# Altium PCB G8160-03-Sensor-Board.PcbDoc
Units mm, origin at the board's own origin, x right, y up, seen from the top; angles counter-clockwise.
Board outline 40 x 12.7 mm, 2 copper layers (Top Layer, Bottom Layer), stack 1.595 mm thick; 15 components, 12 nets, 67 pads, 12 vias.
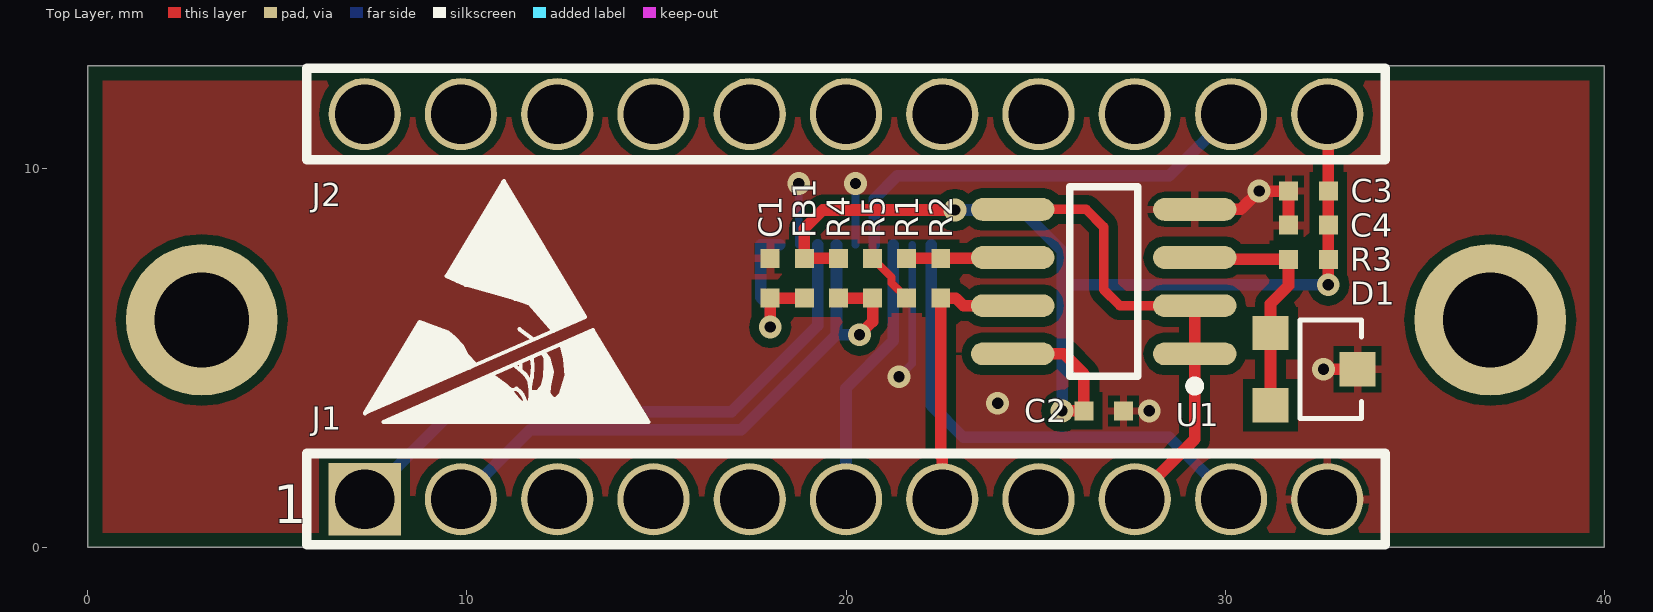
[diagram p0: Top Layer view]
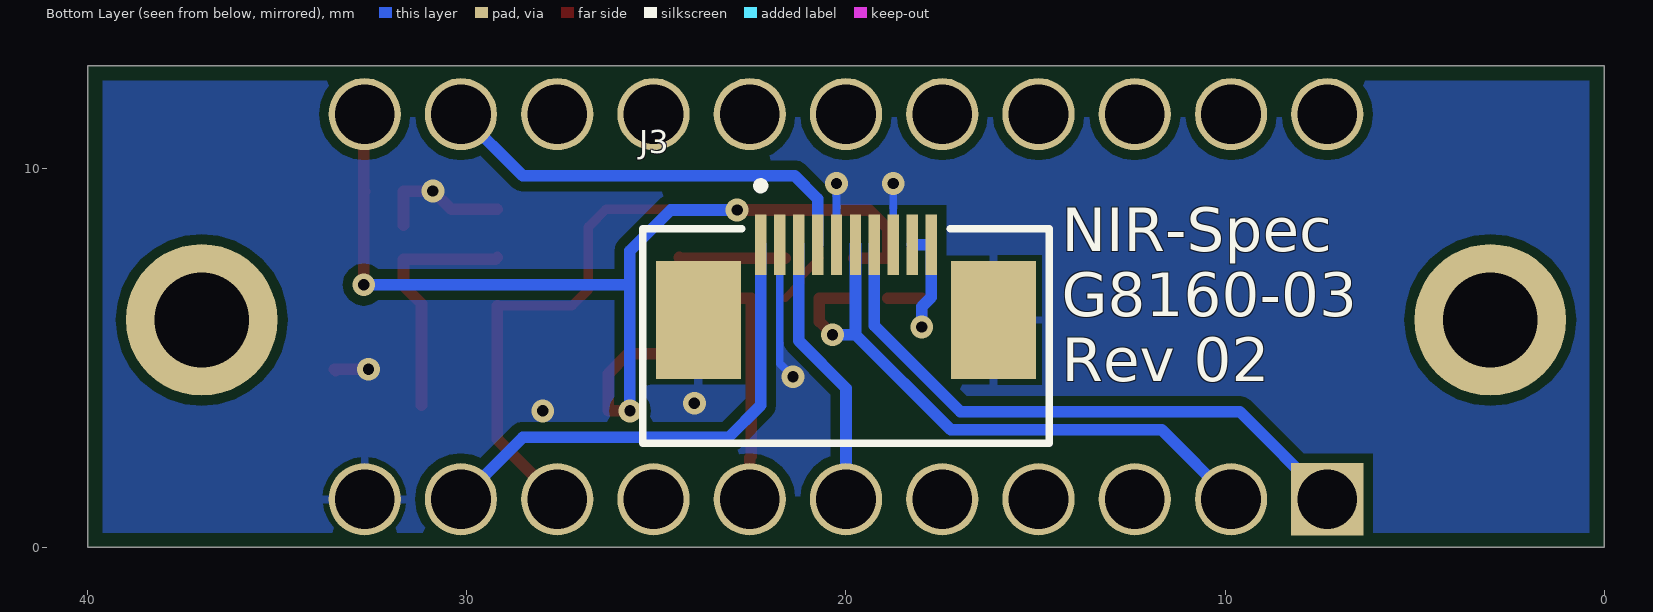
[diagram p1: Bottom Layer view, seen from below]
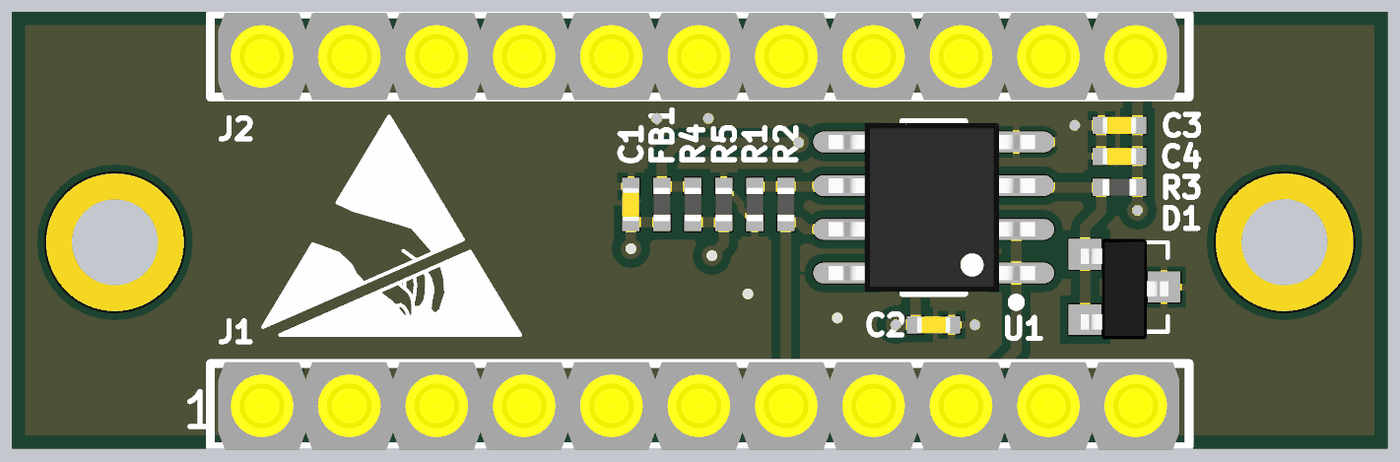
[diagram p2: 3D render of the assembled board from above, using the file's embedded part models]

## Layer stack, top to bottom
Top Solder: solder mask 0.0102, Solder Resist, Dk 3.5
Top Layer: signal copper 0.0356
Dielectric 1: core 1.524, FR-4, Dk 4.2
Bottom Layer: signal copper 0.0356
Solder Side: solder mask 0.0102, Solder Resist, Dk 3.5

## Board outline
0,0 40,0 40,12.7 0,12.7

## Design rules (kind name [scope] priority, off if disabled: settings)
BoardOutlineClearance [All] p1: gap=0.381 ignorepadtopadclearanceinfootprint=FALSE
Clearance "Clearance Polygons" [InPolygon] p1: gap=0.254 ignorepadtopadclearanceinfootprint=FALSE except(0: Arc-Hole Track-Hole SMDPad-Hole THPad-Hole Via-Hole Fill-Hole Poly-Hole Region-Hole Text-Hole)
Clearance [All] p2: gap=0.127 ignorepadtopadclearanceinfootprint=FALSE except(0: Arc-Hole Track-Hole SMDPad-Hole THPad-Hole Via-Hole Fill-Hole Poly-Hole Region-Hole Text-Hole)
ComponentClearance "HM-TRP & UFL" [InComponent('X1') vs InComponent('U1')] p1: gap=0 collisioncheckmode=3 verticalgap=0 showdistances=FALSE
ComponentClearance [All] p2: gap=0.025 collisioncheckmode=3 verticalgap=0.025 showdistances=FALSE
DiffPairsRouting [All] p1: maxlimit=10 minlimit=0.127 mostfreqgap=0.203 toplayer_minwidth=0.127 toplayer_maxwidth=0.381 toplayer_prefwidth=0.203 bottomlayer_minwidth=0.127 bottomlayer_maxwidth=0.381 bottomlayer_prefwidth=0.203 maxuncoupledlength=12.7
HoleSize [All] p1: absolutevalues=TRUE maxlimit=6.731 minlimit=0.254 maxpercent=80.000 minpercent=20.000
HoleToHoleClearance [All] p1: gap=0.254 allowstackedmicrovias=FALSE
MinimumAnnularRing [All] p1: minimumring=0.102
MinimumSolderMaskSliver [All] p1: minsoldermaskwidth=0
PlaneClearance [All] p1: clearance=0.254
PlaneConnect [All] p1: planeconnectstyle=Relief reliefexpansion=0.102 reliefentries=4 reliefconductorwidth=0.152 reliefairgap=0.152
PolygonConnect THERM_V_UNREG [All vs IsNamedPolygon('Top Layer-V_UNREG')] p1: connectstyle=Relief reliefconductorwidth=0.254 reliefentries=2 polygonreliefangle="90 Angle" airgapwidth=0.254
PolygonConnect THERM_VBAT_BOT_1 [All vs IsNamedPolygon('VBAT_BOT')] p2: thpad.connectstyle=Relief thpad.reliefconductorwidth=0.254 thpad.reliefentries=4 thpad.polygonreliefangle="90 Angle" thpad.airgapwidth=0.254 smdpad.connectstyle=Relief smdpad.reliefconductorwidth=0.762 smdpad.reliefentries=4 smdpad.polygonreliefangle="90 Angle" smdpad.airgapwidth=0.254 via.connectstyle=Relief via.reliefconductorwidth=0.254 via.reliefentries=4 via.polygonreliefangle="90 Angle" via.airgapwidth=0.254
PolygonConnect THERM_VBAT_BOT [All vs IsNamedPolygon('VBAT_BOT')] p3: thpad.connectstyle=Relief thpad.reliefconductorwidth=0.254 thpad.reliefentries=4 thpad.polygonreliefangle="90 Angle" thpad.airgapwidth=0.254 smdpad.connectstyle=Relief smdpad.reliefconductorwidth=0.762 smdpad.reliefentries=4 smdpad.polygonreliefangle="90 Angle" smdpad.airgapwidth=0.254 via.connectstyle=Relief via.reliefconductorwidth=0.254 via.reliefentries=4 via.polygonreliefangle="90 Angle" via.airgapwidth=0.254
PolygonConnect PolygonConnect_1 [All vs IsNamedPolygon('VBAT_TOP')] p4: thpad.connectstyle=Relief thpad.reliefconductorwidth=0.254 thpad.reliefentries=4 thpad.polygonreliefangle="90 Angle" thpad.airgapwidth=0.254 smdpad.connectstyle=Relief smdpad.reliefconductorwidth=0.762 smdpad.reliefentries=4 smdpad.polygonreliefangle="90 Angle" smdpad.airgapwidth=0.254 via.connectstyle=Relief via.reliefconductorwidth=0.254 via.reliefentries=4 via.polygonreliefangle="90 Angle" via.airgapwidth=0.254
PolygonConnect THERM_VBAT_TOP_1 [All vs IsNamedPolygon('VBAT_TOP')] p5: thpad.connectstyle=Relief thpad.reliefconductorwidth=0.254 thpad.reliefentries=4 thpad.polygonreliefangle="90 Angle" thpad.airgapwidth=0.254 smdpad.connectstyle=Relief smdpad.reliefconductorwidth=0.762 smdpad.reliefentries=4 smdpad.polygonreliefangle="90 Angle" smdpad.airgapwidth=0.254 via.connectstyle=Relief via.reliefconductorwidth=0.254 via.reliefentries=4 via.polygonreliefangle="90 Angle" via.airgapwidth=0.254
PolygonConnect THERM_VBAT_TOP [All vs IsNamedPolygon('VBAT_TOP')] p6: thpad.connectstyle=Relief thpad.reliefconductorwidth=0.254 thpad.reliefentries=4 thpad.polygonreliefangle="90 Angle" thpad.airgapwidth=0.254 smdpad.connectstyle=Relief smdpad.reliefconductorwidth=0.254 smdpad.reliefentries=4 smdpad.polygonreliefangle="90 Angle" smdpad.airgapwidth=0.254 via.connectstyle=Relief via.reliefconductorwidth=0.762 via.reliefentries=4 via.polygonreliefangle="90 Angle" via.airgapwidth=0.254
PolygonConnect "Via connect style" [isVia] p7: connectstyle=Direct reliefconductorwidth=0.254 reliefentries=4 polygonreliefangle="90 Angle" airgapwidth=0.254
PolygonConnect [All] p8: connectstyle=Relief reliefconductorwidth=0.203 reliefentries=4 polygonreliefangle="90 Angle" airgapwidth=0.152
RoutingCorners [All] p1: cornerstyle=45-Degree minsetback=1.25 maxsetback=1.25
RoutingVias [All] p1: holewidth=0.305 width=0.559 viastyle="Through Hole" minholewidth=0.254 minwidth=0.457 maxholewidth=2.54 maxwidth=2.896
SilkToSilkClearance [All] p1: silktosilkclearance=0
SilkToSolderMaskClearance [IsPad] p1: minsilkscreentomaskgap=0.127 clearancetoexposedcopper=TRUE
SolderMaskExpansion [All] p1: expansion=0.064
Width GND [InNet('GND')] p1: maxlimit=0.762 minlimit=0.203 preferedwidth=0.508
Width Power [InNetClass('Power')] p2: maxlimit=1.016 minlimit=0.508 preferedwidth=0.762
Width 3V3 [InNetClass('3V3')] p3: maxlimit=0.762 minlimit=0.254 preferedwidth=0.508
Width [All] p4: maxlimit=10.16 minlimit=0.152 preferedwidth=0.203
20 further rules are at their usual default settings.

## Components (designator, comment, footprint, x,y, rotation, side; value= is the part's Value field where it differs from the comment)
C1 "10uF" 0402 18,7.1 r270 top
C2 "0.1uF" 0402 26.8,3.6 r180 top
C3 "10uF" 0402 32.2,9.4 r0 top
C4 "0.1uF" 0402 32.2,8.5 r0 top
D1 "TLV431AQFTA" SOT-23-3 30.545,6.416 r270 top
FB1 "Ferrite_Bead" 0402 18.9,7.1 r90 top
J1 "SS-111-G-22" SL-111-TT-11#1 20,1.27 r0 top locked
J2 "SS-111-G-22" SL-111-TT-11#2 20,11.43 r0 top locked
J3 "ZF5S-10-01-T-WT-K-TR" ZF5S-10-01-T-WT-K-TR 20,6 r180 bottom
R1 "1.8k" 0402 21.6,7.1 r270 top
R2 "4.7k" 0402 22.5,7.1 r90 top
R3 "10k" 0402 32.2,7.6 r0 top
R4 "10k" 0402 19.8,7.1 r90 top
R5 "0" 0402 20.7,7.1 r270 top
U1 "MCP6002" SOIC_8 26.8,7.012 r180 top

## Footprints (in the part's own frame and the unit in brackets; to place one, negate y for a bottom-side part, rotate by r counter-clockwise, add the part's x,y. Pads: shape width x height; smd on the part's side, far side on the other; paste and mask are expansions set on the pad)
0402 [mm] "Chip Capacitor; Body 1.0 x 0.5 mm (LxW typ)"
  rect 0.5x0.5 smd mask+0.038: 1(-0.525,0) 2(0.525,0)
  body extent -0.5,-0.25 0.5,0.25, height 0.6
SL-111-TT-11#1 [mil] "CONN RCPT .100\" 11POS TIN PCB"
  rect 75x75 hole 62 mask+1.5: 1(-500,0)
  round 75 hole 62 mask+1.5: 2(-400,0) 3(-300,0) 4(-200,0) 5(-100,0) 6(0,0) 7(100,0) 8(200,0) 9(300,0) 10(400,0) 11(500,0)
  silkscreen extent -560,-48 560,48, body extent -551,-51 549,49, height 78
SL-111-TT-11#2 [mil] "CONN RCPT .100\" 11POS TIN PCB"
  round 75 hole 62 mask+1.5: 1(-500,0) 2(-400,0) 3(-300,0) 4(-200,0) 5(-100,0) 6(0,0) 7(100,0) 8(200,0) 9(300,0) 10(400,0) 11(500,0)
  silkscreen extent -560,-48 560,48, body extent -551,-51 549,49, height 78
SOIC_8 [mm] "0.154\", 3.90mm Width"
  oval 2.2x0.6 smd mask+0.038: 1(-2.4,1.905) 2(-2.4,0.635) 3(-2.4,-0.635) 4(-2.4,-1.905) 5(2.4,-1.905) 6(2.4,-0.635) 7(2.4,0.635) 8(2.4,1.905)
  silkscreen extent -2.53,-2.5 0.9,2.88, body extent -2.95,-2.45 3.05,2.45, height 1.75
SOT-23-3 [mm]
  rect 0.9x0.95 smd mask+0.038: 1(0.766,0.655) 2(2.666,0.655) 3(1.716,2.955)
  silkscreen extent 0.42,1.43 3.02,3.06, body extent 0.31,0.53 3.24,3.07, height 0.98
ZF5S-10-01-T-WT-K-TR [mm]
  rect 0.3x1.6 smd: 1(-2.25,1.98) 2(-1.75,1.98) 3(-1.25,1.98) 4(-0.75,1.98) 5(-0.25,1.98) 6(0.25,1.98) 7(0.75,1.98) 8(1.25,1.98) 9(1.75,1.98) 10(2.25,1.98)
  rect 2.24x3.12 smd: S1(-3.897,0) S2(3.897,0)
  silkscreen extent -5.37,-3.25 5.37,3.64, body extent -5.33,-3.26 5.33,2.41, height 2.17

## Part data
C1 C3: library part CAP, "CAP CER 10UF 10V X6S 0603", Manufacturer="Murata Electronics", Part Number=GRM188C81A106MA73D, Voltage=10V
C2 C4: library part CAP, "CAP CER 0.1UF 50V X7R 0603", Manufacturer=KEMET, Part Number=C0603C104K5RAC3121, Voltage=50V
D1: "Shunt Voltage Reference IC Adjustable 1.24V 18 VV ±1% 15 mA SOT-23-3", Manufacturer="Diodes Incorporated", Part Number=TLV431AQFTA
FB1: "Ferrite Beads 1000 OHM 25%", Manufacturer="Murata Electronics", Part Number=BLM18AG102SH1D, Rated Current="450mA Max", ClassName="3.3V Regulator", Impedance="1kO at 100MHz"
J1 J2: library part SL-111-TT-11, "CONN RCPT .100\" 11POS TIN PCB", Manufacturer=Samtec, Model Number=SS-111-G-22
J3: Manufacturer=Samtec, Part Number=ZF5S-10-01-T-WT-K-TR
R1 R2 R3 R4 R5: library part RES, Manufacturer=-, Part Number=-
U1: library part AD8072, "IC OPAMP VIDEO DUAL 8MSOP", Manufacturer="Analog Devices Inc.", Part Number=AD8072ARMZ

## Free pads (board coordinates)
  round 4 hole 2.5: ""(3,6) ""(37,6)

## Via types
v1: diameter 0.6, hole 0.3, Top Layer to Bottom Layer, tented both sides, 12 vias

## Nets (pads, with @x,y where several pads share a name; then routed paths per layer and width w, separated by ;. In a path a pad name is that pad's centre, name@x,y a point inside that pad or via, vN(x,y) a via of type N, cw(c..) or ccw(c..) an arc to the next point about the centre after c; other vN are vias at no path point)
+1.25V: J1.9 U1.1 U1.2 U1.5 | length 12.6
  Top Layer w0.254: U1.5 26.339,8.917 26.8,8.455 26.8,6.8 27.223,6.377 U1.2
  Top Layer w0.305: J1.9 29.2,2.85 U1.1 U1.2
+4.5V: J1.7 R2.1 U1.7 | length 7.3
  Top Layer w0.305: J1.7 22.54,2.36 22.5,2.4 R2.1 22.902,6.575 23.1,6.377 U1.7
+5.0V: C1.2 FB1.1 J3.9 J3.10 | length 4.4
  Top Layer w0.305: v1(18,5.813) C1.2 FB1.1
  Bottom Layer w0.305: v1(18,5.813) 18,6.346 17.75,6.596 J3.10 J3.9
+5.0V_CLEAN: C2.2 C3.2 C4.2 FB1.2 J2.11 R3.2 R4.2 U1.8 | length 28.6
  Top Layer w0.305: R4.2 FB1.2 18.9,8.41 19.39,8.9 v1(22.873,8.9) ; U1.8 25.751,5.107 26.275,4.583 C2.2 v1(25.7,3.6) ; J2.11 32.725,11.405 C3.2 ; C3.2@32.702,9.4 32.725,9.377 C4.2 R3.2 v1(32.725,6.931)
  Bottom Layer w0.305: v1(22.873,8.9) 24.627,8.9 25.7,7.827 25.7,6.9 ; v1(25.7,3.6) 25.7,6.9 ; v1(32.725,6.931) 25.731,6.931 25.7,6.9
D_CFSEL: J1.2 J3.6 R4.1 R5.2 | length 16.7
  Top Layer w0.305: R4.1 R5.2 20.7,5.956 v1(20.355,5.612)
  Bottom Layer w0.305: J1.2 11.67,3.1 17.238,3.1 19.75,5.612 ; J3.6 19.75,5.612 ; v1(20.355,5.612) 19.75,5.612
D_CLK: J1.1 J3.7 | length 16
  Bottom Layer w0.305: J1.1 9.613,3.583 16.983,3.583 19.25,5.85 J3.7
D_RESET: J1.6 J3.3 | length 7.2
  Bottom Layer w0.305: J1.6 20,4.2 21.25,5.45 J3.3
D_TRIG: J2.10 J3.4 | length 11.6
  Bottom Layer w0.305: J3.4 20.75,9.2 21.35,9.8 28.53,9.8 J2.10
D_VID: J1.10 J3.1 | length 13.2
  Bottom Layer w0.305: J3.1 22.25,3.75 23.1,2.9 28.53,2.9 J1.10
GND: C1.1 C2.1 C3.1 C4.1 D1.3 J1.11 J3.2 J3.5 J3.8 J3.S1 J3.S2 R1.2 R5.1 U1.4 | length 12.8
  Top Layer w0.203: R5.1 21.2,7.125 21.2,6.975 R1.2
  Top Layer w0.305: U1.4 30.417,8.917 v1(30.9,9.4) C3.1 C4.1 ; v1(32.6,4.7) D1.3 D1.3@33.464,4.664
  Bottom Layer w0.203: J3.8 v1(18.75,9.6) ; J3.5 v1(20.25,9.6) ; v1(21.4,4.5) 21.75,4.85 J3.2
  other v1: 28,3.6 24,3.8
NetD1_1: D1.1 D1.2 R3.1 U1.3 | length 6.5
  Top Layer w0.305: U1.3 29.247,7.6 R3.1 31.675,6.905 31.2,6.43 D1.1 D1.2
NetR1_1: R1.1 R2.2 U1.6 | length 2.8
  Top Layer w0.305: R1.1 R2.2 24.378,7.625 U1.6
pads on no net: J1.3 J1.4 J1.5 J1.8 J2.1 J2.2 J2.3 J2.4 J2.5 J2.6 J2.7 J2.8 J2.9

## Polygon pours and split planes (outlines as drawn)
GND on Top Layer "GND_L01_P004" (solid, remove dead copper, pour order 4): 0,0 40,0 40,12.7 0,12.7
GND on Bottom Layer "GND_L02_P005" (solid, remove dead copper, pour order 5): 0,0 40,0 40,12.7 0,12.7

## Silkscreen, mask and mechanical layers (free items; w line width, h text height)
Top Overlay:
  drawing of 234 lines, arcs and shapes, not listed
Bottom Overlay:
  text "NIR-Spec / G8160-03 / Rev 02" at 14.312,4.378 h1.14
Mechanical 1:
  the board outline again, w0.254
ASSY_TOP:
  drawing of 338 lines, arcs and shapes, not listed
  text "SH" at 387.003,288.663 h2.54
  text "DWG NO" at 311.851,288.248 h2.54
  text ".DocNumber" at 328.502,285.408 h3.05
  text "2" at -210.493,284.92 h5.08
  text "4" at 5.58,284.92 h5.08
  text "8" at 429.938,284.92 h5.08
  text "1" at -318.221,284.76 h5.08
  text "3" at -102.499,284.76 h5.08
  text "5" at 113.579,284.76 h5.08
  text "6" at 221.526,284.76 h5.08
  text "1" at 392.002,284.392 h3.05
  text "REVISION HISTORY" at 338.154,278.013 h2.54
  text "REV" at 313.77,271.946 h2.54
  text "DESCRIPTION" at 359.49,271.946 h2.54
  text "DATE" at 417.91,271.946 h2.54
  text "APPROVED" at 448.39,271.946 h2.54
  text ".Hist1Rev" at 314.675,267.345 h2.54
  text ".Hist1Desc" at 326.47,266.866 h2.54
  text ".Hist1Date" at 410.29,266.866 h2.54
  text ".Hist1Appr" at 440.77,266.866 h2.54
  text "NOTES" at -331.39,265.59 h10.16
  text ".Hist2Rev" at 314.675,261.732 h2.54
  text ".Hist2Desc" at 326.47,261.252 h2.54
  text ".Hist2Date" at 410.29,261.252 h2.54
  text ".Hist2Appr" at 440.77,261.252 h2.54
  text "1. DIMENSIONING AND TOLERANCING PER ASME Y14.5M-1994" at -331.39,257.97 h5.08
  text ".Hist3Rev" at 314.675,256.144 h2.54
  text ".Hist3Desc" at 326.47,255.664 h2.54
  text ".Hist3Date" at 410.29,255.664 h2.54
  text ".Hist3Appr" at 440.77,255.664 h2.54
  text "2. INTERPRET PER ASME Y14.100M" at -331.39,250.35 h5.08
  text "3. ASSEMBLE PER IPC-A-610, CLASS 2" at -331.39,242.73 h5.08
  text "4. SOLDER PER J-STD-001, CLASS 2. USE LEAD-FREE SOLDER" at -331.39,235.11 h5.08
  text "5. ALL PARTS SHOWN MAY NOT BE INSTALLED. FOR SCHEMATIC, SEE SEPARATE PARTS LIST" at -331.39,227.49 h5.08
  text "A" at -360.29,221.255 h5.08
  text "A" at 477.997,221.255 h5.08
  text "6. DATA INCLUDED IN PARENTHESIS IS FOR REFERENCE ONLY" at -331.39,219.87 h5.08
  text "7. FOR COMPONENTS WITH REFERENCE DESIGNATORS, REFER TO PARTS LIST BY REFERENCE DESIGNATION" at -331.39,212.25 h5.08
  text "8. ELECTROSTATIC DISCHARGE CONTROL PROGRAM FOR PROTECTION OF ELECTRICAL AND ELECTRONIC" at -331.39,204.63 h5.08
  text "PARTS, ASSEMBLIES, AND EQUIPMENT SHALL BE PER IPC-610 OR BETTER" at -331.39,197.01 h5.08
  text "9. THE PCB MATERIAL MANUFACTURER'S RECOMMENDATIONS FOR PCB MATERIAL STORAGE, PRE-PROCESS" at -331.39,189.39 h5.08
  text "BAKEOUT, PROCESSING AND MATERIAL HANDLING SHALL BE STRICTLY FOLLOWED DURING ALL ASSEMBLY" at -326.31,181.77 h5.08
  text "PROCESSES. DEVIATION FROM THESE STANDARDS REQUIRES WRITTEN AUTHORIZATION FROM OCEAN OPTICS, INC" at -326.31,174.15 h5.08
  text "10. MARK LAST 3 DIGITS OF DRAWING NUMBER (-XXX) IN A CLEAR AND LEGIBLE MANNER USING POLYIMIDE BRADY LABEL" at -333.93,166.53 h5.08
  text "11. MARK DOCUMENT REVISION IN A CLEAR AND LEGIBLE MANNER USING POLYIMIDE BRADY LABEL" at -333.93,158.91 h5.08
  text "12. ALL PROCESSES AND PROCEDURES SHALL BE ROHS COMPLIANT" at -333.93,151.29 h5.08
  text "13. COMPLETED CIRCUIT CARD ASSEMBLIES SHALL BE PACKAGED INDIVIDUALLY" at -333.93,143.67 h5.08
  text "IN STATIC SHIELDING PACKAGING IN ACCORDANCE WITH ANSI/ESD-S-20.20" at -326.31,136.05 h5.08
  text "B" at -360.34,81.395 h5.08
  text "B" at 477.947,81.395 h5.08
  text "C" at -359.755,-58.078 h5.08
  text "C" at 478.531,-58.078 h5.08
  text "SEE SEPARATE PARTS LIST." at 209.376,-176.872 h10.16
  text "DFTG" at 250.27,-185.791 h2.54
  text ".NameDftg" at 263.478,-185.791 h2.54
  text ".DateDftg" at 303.102,-185.791 h2.54
  text "UNLESS OTHERWISE SPECIFIED," at 195.406,-190.109 h2.03
  text "MATERIAL:" at 132.236,-190.334 h2.54
  text "ENG" at 250.27,-192.395 h2.54
  text ".NameEng" at 263.478,-192.395 h2.54
  text ".DateEng" at 303.102,-192.395 h2.54
  text "INCHES" at 231.474,-193.636 h2.03
  text "DIMENSIONS ARE IN" at 195.406,-193.665 h2.03
  text "D" at -360.008,-197.777 h5.08
  text "D" at 478.279,-197.777 h5.08
  text "MECH" at 250.27,-197.983 h2.54
  text "*" at 263.478,-198.491 h2.54
  text "*" at 303.102,-198.491 h2.54
  text "TITLE:" at 342.08,-200.523 h2.54
  text "TOLERANCES:" at 195.406,-201.539 h2.54
  text "SEE NOTES" at 134.065,-203.542 h2.54
  text "MFG" at 250.27,-204.587 h2.54
  text "*" at 263.478,-204.587 h2.54
  text "*" at 303.102,-205.095 h2.54
  text ".X +/- 0.1" at 196.422,-206.111 h2.54
  text ".XX +/- 0.01" at 196.422,-209.159 h2.54
  text ".TitleCCA" at 348.695,-209.511 h5.59
  text ".XXX +/- 0.001" at 196.422,-212.207 h2.54
  text ".Title0" at 388.04,-219.169 h5.59
  text "THIRD ANGLE PROJECTION" at 133.684,-223.761 h2.54
  text "ALL SHEETS ARE THE" at 199.978,-227.859 h2.54
  text ".Title1" at 345.52,-228.44 h5.59
  text "SAME REVISION STATUS" at 197.628,-232.431 h2.54
  text "SIZE" at 342.218,-235.575 h2.54
  text "DRAWING NUMBER" at 351.87,-235.575 h2.54
  text "REV" at 458.942,-237.125 h3.05
  text "D" at 342.26,-243.416 h5.08
  text ".DocNumber" at 351.87,-243.674 h6.6
  text ".Rev" at 458.55,-243.674 h5.08
  text "1" at 443.31,-248.754 h2.54
  text "2" at 458.55,-248.754 h2.54
  text "1:1" at 355.68,-249.008 h2.54
  text "SCALE" at 341.654,-249.183 h2.54
  text "SHEET   OF" at 427.561,-249.398 h2.54
  text "8" at 435.436,-259.93 h5.08
  text "1" at -318.055,-260.184 h5.08
  text "2" at -210.493,-261.178 h5.08
  text "4" at 5.58,-261.178 h5.08
  text "3" at -102.499,-261.338 h5.08
  text "5" at 113.579,-261.338 h5.08
  text "6" at 221.526,-261.338 h5.08
  text "7" at 329.5,-261.338 h5.08
Drill Drawing:
  lines w0.381: -291.218,-191.604 -291.218,-183.984 ; -273.493,-191.604 -273.493,-183.984 ; -239.315,-191.604 -239.315,-183.984 ; -226.466,-191.604 -226.466,-183.984 ; -305.21,-191.604 -206.684,-191.604 -206.684,-183.984 -305.21,-183.984 -305.21,-191.604 ; -305.21,-187.794 -206.684,-187.794 -305.21,-187.794
  text "Symbol" at -302.924,-186.651 h1.83
  text "Hit Count" at -290.075,-186.651 h1.83
  text "Finished Hole Size" at -272.35,-186.651 h1.83
  text "Plated" at -238.172,-186.651 h1.83
  text "Hole Type" at -225.323,-186.651 h1.83
ASSY_BOT:
  lines w0.198: -341.412,271.438 -181.697,271.438 ; -341.412,276.518 -181.697,276.518 ; -308.316,271.565 -308.311,282.103 ; -275.677,271.057 -275.677,282.106 ; -194.397,265.723 -194.397,282.106 ; -366.95,-263.797 -366.95,294.806 ; -366.95,-263.797 496.483,-263.797 ; -366.95,-263.797 496.483,-263.797 ; -366.95,-263.797 -366.95,294.806 ; -366.95,294.806 496.483,294.806 ; -366.95,294.806 496.483,294.806 ; 496.483,-263.797 496.483,294.806 ; 496.483,-263.797 496.483,294.806
  lines w0.599: -360.782,-117.947 -341.732,-117.947 ; -360.782,155.102 -341.732,155.102 ; -341.732,282.101 -341.732,-251.297 ; -341.732,-232.247 -211.684,-232.247 ; -326.721,-244.947 -326.721,-232.247 ; -297.282,-251.297 -297.282,-244.947 ; -259.182,-260.822 -259.182,-251.297 ; -211.685,-251.167 -211.685,-232.628 ; -181.819,265.088 -181.819,282.103 ; -151.233,-260.822 -151.233,-251.297 ; -151.233,282.101 -151.233,291.626 ; -43.283,-260.822 -43.283,-251.297 ; -43.283,282.101 -43.283,291.626 ; 172.617,-260.822 172.617,-251.297 ; 172.617,282.101 172.617,291.626 ; 280.567,-260.822 280.567,-251.297 ; 388.516,-260.822 388.516,-251.297 ; 388.516,282.101 388.516,291.626 ; 471.066,155.102 490.116,155.102 ; 471.066,282.103 -341.745,282.103 ; 471.701,-117.947 490.751,-117.947 ; -341.745,282.103 -341.745,261.626 -341.745,282.103 ; -341.732,-251.297 471.066,-251.297 ; -341.732,-251.297 471.066,-251.297 ; -341.732,-251.297 471.066,-251.297 ; -341.732,-251.297 471.066,-251.297 ; -341.732,-244.947 -211.684,-244.947 ; -341.732,-244.947 -211.684,-244.947 ; -341.732,-244.947 -211.684,-244.947 ; -341.732,-244.947 -211.684,-244.947 ; -269.342,282.101 -269.342,291.753 ; -269.342,282.101 -269.342,291.753 ; -269.342,282.101 -269.342,291.753 ; -269.342,282.101 -269.342,291.753 ; -269.342,282.101 -269.342,291.753 ; -269.342,282.101 -269.342,291.753 ; -269.342,282.101 -269.342,291.753 ; -269.342,282.101 -269.342,291.753 ; -269.342,291.753 -181.799,291.753 ; -269.342,291.753 -186.792,291.753 -269.342,291.753 ; -269.342,291.753 -181.799,291.753 ; -256.642,282.101 -256.642,291.753 ; -256.642,282.101 -256.642,291.753 ; -256.642,282.101 -256.642,291.753 ; -256.642,282.101 -256.642,291.753 ; -181.799,291.753 -181.799,282.101 -181.799,291.753 ; 280.567,282.101 280.567,291.626 ; 280.567,282.101 280.567,291.626 ; 280.567,282.101 280.567,291.626 ; 280.567,282.101 280.567,291.626 ; 471.066,-251.297 471.066,274.278 471.066,-251.297 ; 471.066,-251.297 471.066,282.101 ; 471.066,-251.297 471.066,282.101 ; 471.066,-251.297 471.066,282.101 ; -351.892,14.64 -351.892,16.164 -346.812,16.164 -346.812,17.942 -341.732,15.402 -346.812,12.862 -346.812,14.64 -351.892,14.64 ; 62.127,-256.377 64.667,-251.297 67.207,-256.377 65.429,-256.377 65.429,-261.457 63.905,-261.457 63.905,-256.377 62.127,-256.377 ; 62.127,287.181 64.667,282.101 67.207,287.181 65.429,287.181 65.429,292.26 63.905,292.26 63.905,287.181 62.127,287.181 ; 471.066,15.402 476.146,12.862 476.146,14.64 481.226,14.64 481.226,16.164 476.146,16.164 476.146,17.942 471.066,15.402
  text "SH" at -257.47,288.663 h2.54
  text "DWG NO" at -182.318,288.248 h2.54
  text ".DocNumber" at -198.969,285.408 h3.05
  text "8" at -300.405,284.92 h5.08
  text "4" at 123.953,284.92 h5.08
  text "2" at 340.026,284.92 h5.08
  text "6" at -91.993,284.76 h5.08
  text "5" at 15.954,284.76 h5.08
  text "3" at 232.032,284.76 h5.08
  text "3" at 232.032,284.76 h5.08
  text "1" at 447.754,284.76 h5.08
  text "1" at -262.469,284.392 h3.05
  text "REVISION HISTORY" at -208.621,278.013 h2.54
  text "APPROVED" at -318.857,271.946 h2.54
  text "DATE" at -288.377,271.946 h2.54
  text "DESCRIPTION" at -229.957,271.946 h2.54
  text "REV" at -184.237,271.946 h2.54
  text "SEE SHEET 1" at -196.937,266.866 h2.54
  text "A" at -348.464,221.255 h5.08
  text "A" at 489.823,221.255 h5.08
  text "B" at -348.414,81.395 h5.08
  text "B" at 489.873,81.395 h5.08
  text "C" at -348.998,-58.078 h5.08
  text "C" at 489.288,-58.078 h5.08
  text "D" at -348.746,-197.777 h5.08
  text "D" at 489.541,-197.777 h5.08
  text "REV" at -329.409,-237.125 h3.05
  text ".DocNumber" at -217.892,-242.404 h5.08
  text ".Rev" at -329.017,-243.674 h5.08
  text "2" at -329.017,-248.754 h2.54
  text "SHEET 2 OF" at -298.028,-249.398 h2.54
  text "8" at -305.903,-259.93 h5.08
  text "1" at 447.755,-260.184 h5.08
  text "4" at 123.953,-261.178 h5.08
  text "2" at 340.026,-261.178 h5.08
  text "7" at -199.967,-261.338 h5.08
  text "6" at -91.993,-261.338 h5.08
  text "5" at 15.954,-261.338 h5.08
  text "3" at 232.032,-261.338 h5.08
PCB_SHEET1:
  drawing of 741 lines, arcs and shapes, not listed
  text "SH" at 387.003,288.657 h2.54
  text "DWG NO" at 311.851,288.243 h2.54
  text "DWG NO" at 311.851,288.248 h2.54
  text ".DocNumberPCB" at 328.502,285.402 h3.05
  text "2" at -210.493,284.914 h5.08
  text "4" at 5.58,284.914 h5.08
  text "8" at 429.938,284.914 h5.08
  text "1" at -318.221,284.754 h5.08
  text "3" at -102.499,284.754 h5.08
  text "5" at 113.579,284.754 h5.08
  text "6" at 221.526,284.754 h5.08
  text "1" at 392.002,284.386 h3.05
  text "REVISION HISTORY" at 338.154,278.008 h2.54
  text "REV" at 313.77,271.94 h2.54
  text "DESCRIPTION" at 359.49,271.94 h2.54
  text "DATE" at 417.91,271.94 h2.54
  text "APPROVED" at 448.39,271.94 h2.54
  text "11" at 16.59,268.13 h5.08
  text "5" at 26.242,268.13 h5.08
  text ".Hist1Rev" at 314.675,267.34 h2.54
  text "LAYER STACKUP:" at 36.402,266.86 h10.16
  text ".Hist1Desc" at 326.47,266.86 h2.54
  text ".Hist1Date" at 410.29,266.86 h2.54
  text ".Hist1Appr" at 440.77,266.86 h2.54
  text "NOTES" at -331.39,265.59 h10.16
  text ".Hist2Rev" at 314.675,261.777 h2.54
  text ".Hist2Desc" at 326.47,261.297 h2.54
  text ".Hist2Date" at 410.29,261.297 h2.54
  text ".Hist2Appr" at 440.77,261.297 h2.54
  text "1. UNLESS OTHERWISE SPECIFIED, DIMENSIONS, TOLERANCES, AND SURFACE TEXTURE APPLY" at -331.39,257.97 h5.08
  text ".Hist3Rev" at 314.675,256.164 h2.54
  text ".Hist3Desc" at 326.47,255.684 h2.54
  text ".Hist3Date" at 410.29,255.684 h2.54
  text ".Hist3Appr" at 440.77,255.684 h2.54
  text "AFTER PLATING OR CHEMICAL FILM TREATMENTS, AND PRIOR TO ORGANIC COATINGS." at -326.31,250.35 h5.08
  text "2. DIMENSIONING AND TOLERANCING PER ASME Y14.5M-1994" at -331.39,242.73 h5.08
  text "3. PARTS SHALL BE FREE OF BURRS AND SHARP EDGES. BREAK SHARP EDGES .005\" MAX" at -331.39,235.11 h5.08
  text "Layer" at 15.858,234.221 h0.76
  text "Name" at 21.217,234.221 h0.76
  text "Material" at 33.177,234.221 h0.76
  text "Thickness" at 44.248,234.221 h0.76
  text "Constant" at 52.654,234.221 h0.76
  text "Board Layer Stack" at 60.043,234.221 h0.76
  text "1" at 15.858,232.697 h0.76
  text "Top Overlay" at 21.217,232.697 h0.76
  text "2" at 15.858,231.173 h0.76
  text "Top Solder" at 21.217,231.173 h0.76
  text "Solder Resist" at 33.177,231.173 h0.76
  text "0.40mil" at 44.248,231.173 h0.76
  text "3.5" at 52.654,231.173 h0.76
  text "3" at 15.858,229.649 h0.76
  text "Top Layer" at 21.217,229.649 h0.76
  text "Copper" at 33.177,229.649 h0.76
  text "1.40mil" at 44.248,229.649 h0.76
  text "4" at 15.858,228.125 h0.76
  text "Dielectric 1" at 21.217,228.125 h0.76
  text "FR-4" at 33.177,228.125 h0.76
  text "60.00mil" at 44.248,228.125 h0.76
  text "4.2" at 52.654,228.125 h0.76
  text "4. UNLESS OTHERWISE SPECIFIED, BOARD SHALL MEET THE REQUIREMENTS OF IPC-6011" at -331.39,227.49 h5.08
  text "5" at 15.858,226.601 h0.76
  text "Bottom Layer" at 21.217,226.601 h0.76
  text "Copper" at 33.177,226.601 h0.76
  text "1.40mil" at 44.248,226.601 h0.76
  text "6" at 15.858,225.077 h0.76
  text "Solder Side" at 21.217,225.077 h0.76
  text "Solder Resist" at 33.177,225.077 h0.76
  text "0.40mil" at 44.248,225.077 h0.76
  text "3.5" at 52.654,225.077 h0.76
  text "7" at 15.858,223.553 h0.76
  text "Bottom Overlay" at 21.217,223.553 h0.76
  text "A" at -360.29,221.249 h5.08
  text "A" at 477.997,221.249 h5.08
  text "CLASS 2, AND IPC-6012, TYPE 2." at -326.31,219.87 h5.08
  text "5. MATERIAL: POLYCLAD 370HR OR EQUIVALENT IAW IPC-4101. THIS BOARD IS INTENDED FOR LEAD-FREE" at -331.39,212.25 h5.08
  text "ASSEMBLY (RoHS COMPLIANT). FLAMMABILITY RATING OF 94V-0 OR BETTER REQUIRED. BOARD MUST BE UL" at -326.31,204.63 h5.08
  text "RECOGNIZED AND VENDOR SHALL AFFIX UL LISTING DESIGNATION ON PRINTED CIRCUIT BOARD." at -326.31,197.01 h5.08
  text "A. BASE LAMINATE: WOVEN GLASS BASED EPOXY RESIN." at -326.31,189.39 h5.08
  text "SEE STACK DETAIL FOR COPPER WEIGHT, SUBSTRATES, AND FINISHED BOARD THICKNESS" at -319.96,181.77 h5.08
  text "B. BONDING AGENT: PREIMPREGNATED B-STAGE EPOXY CLOTH (GF)" at -326.31,174.15 h5.08
  text "C. FINISH TO BE DONE USING IMMERSION GOLD (ENIG) 3-6 MICROINCHES OVER NICKEL 100 MICROINCHES MIN." at -326.31,166.53 h5.08
  text "FULL BODY IMMERSION GOLD ACCEPTED." at -319.96,158.91 h5.08
  text "OVERALL HEIGHT = 0.xxx +/- 10%" at 8.589,153.074 h5.08
  text "D. SILKSCREEN TO BE DONE USING NON-CONDUCTIVE WHITE EPOXY INK. VENDOR MAY VIA CAP OR PLUG VIAS" at -326.31,151.29 h5.08
  text "TOP AND BOTTOM LAYER COPPER THICKNESS SPECIFIED AFTER PLATING" at 8.589,146.083 h5.08
  text "BEFORE FINAL SOLDERMASK TO AVOID TRIMMING OF SILKSCREEN. SILKSCREEN INK NOT ALLOWED ON ANY" at -319.96,143.67 h5.08
  text "EXPOSED ETCH. VENDOR TO DETERMINE BEST PROCESS TO ENSURE THIS." at -319.96,136.05 h5.08
  text "E. SOLDERMASK OVER BARE COPPER FOLLOWED BY PLATING PER LAYER STACKUP." at -326.31,128.43 h5.08
  text "SOLDERMASK IS TO BE FREE OF SHADED AREAS, AND IS TO BE BLACK, TYPE B1, CLASS 2, IAW IPC-SM-840." at -319.96,120.81 h5.08
  text "6. FINAL TRACES WIDTHS AND LAND SIZES REPRESENTED BY ARTWORK. THE FINAL" at -331.39,113.19 h5.08
  text "CONDUCTOR WIDTH SHALL BE +/- 0.001\" OF THE ORIGINAL ARTWORK TRACE. THE PCB" at -326.31,105.57 h5.08
  text "MANUFACTURER IS DIRECTED TO INFLATE FEATURES IN THE SUPPLIED GERBER FILES, AS" at -326.31,97.95 h5.08
  text "NECESSARY, TO COMPENSATE FOR THE ETCHBACK IN THE PCB MANUFACTURER'S PROCESS." at -326.31,90.33 h5.08
  text "7. MANUFACTURER TO INSERT COMPANY LOGO AND DATE CODE IN BOTTOM SILKSCREEN," at -332.025,82.71 h5.08
  text "B" at -360.34,81.39 h5.08
  text "B" at 477.947,81.39 h5.08
  text "USING PREFERRED METHOD (NON-CONDUCTIVE)." at -326.31,75.09 h5.08
  text "8. UNLESS OTHERWISE SPECIFIED:" at -332.025,67.47 h5.08
  text "A. ALL HOLES TO BE CONCENTRIC WITH PAD CENTER WITHIN +/- 0.005\"." at -326.31,59.85 h5.08
  text "B. ALL HOLE DIAMETERS TO BE WITHIN +/- 0.003\" OF SPECIFIED DIAMETER." at -326.31,52.23 h5.08
  text "C. PLATED THROUGH HOLE DIAMETERS SPECIFIED AFTER PLATING." at -326.31,44.61 h5.08
  text "9. FABRICATE AND TEST BOARD, TYPE 2, CLASS 1, LEVEL A, PER IPC-D-275. VENDOR MUST USE IPC D 356 NETLIST" at -331.39,36.99 h5.08
  text "PROVIDED PRIOR TO BOARD FABRICATION AND REPORT ANY DISCREPANCIES WHEN COMPARED WITH THE GERBERS." at -326.31,29.37 h5.08
  text "10. INFORMATION IN PARENTHESIS IS FOR REFERENCE ONLY." at -331.39,21.75 h5.08
  text "11. VENDOR IS ALLOWED TO DO THE FOLLOWING:" at -331.39,14.13 h5.08
  text "A. FOLLOW BOARD OUTLINE FOR SIZE OF BOARD." at -326.31,6.51 h5.08
  text "B. REMOVE INTERNAL NON FUNCTIONAL PADS." at -326.31,-1.11 h5.08
  text "C. ADD TEAR DROPPING" at -326.31,-8.73 h5.08
  text "D. REMOVE SOLDERMASK SLIVERS LESS THAN 0.003 TO ENHANCE PRODUCABILITY." at -326.31,-16.35 h5.08
  text "E. FILL VIAS IN PAD WITH EPOXY IF NECESSARY (VIPPO)." at -326.31,-23.97 h5.08
  text "F. MODIFY DIELECTRIC THICKNESS BETWEEN LAYERS, WHILE MAINTAINING TOTAL BOARD THICKNESS." at -326.31,-31.59 h5.08
  text "12. VENDOR IS ALLOWED TO MODIFY TRACE WIDTH/GAP TO MAINTAIN CONTROLLED IMPEDANCES:" at -331.39,-39.21 h5.08
  text "A. xxx" at -326.31,-46.83 h5.08
  text "B. xx" at -326.31,-54.45 h5.08
  text "C" at -359.755,-58.084 h5.08
  text "C" at 478.531,-58.084 h5.08
  text "DFTG" at 250.27,-185.796 h2.54
  text ".NameDftg" at 263.478,-185.796 h2.54
  text ".DateDftg" at 303.102,-185.796 h2.54
  text "UNLESS OTHERWISE SPECIFIED," at 195.406,-190.114 h2.03
  text "MATERIAL:" at 132.236,-190.34 h2.54
  text "ENG" at 250.27,-192.4 h2.54
  text ".NameEng" at 263.478,-192.4 h2.54
  text ".DateEng" at 303.102,-192.4 h2.54
  text "INCHES" at 231.474,-193.642 h2.03
  text "DIMENSIONS ARE IN" at 195.406,-193.67 h2.03
  text "D" at -360.008,-197.783 h5.08
  text "D" at 478.279,-197.783 h5.08
  text "MECH" at 250.27,-197.988 h2.54
  text "*" at 263.478,-198.496 h2.54
  text "*" at 303.102,-198.496 h2.54
  text "TITLE:" at 342.08,-200.528 h2.54
  text "TOLERANCES:" at 195.406,-201.544 h2.54
  text "SEE NOTES" at 134.065,-203.548 h2.54
  text "MFG" at 250.27,-204.592 h2.54
  text "*" at 263.478,-204.592 h2.54
  text "*" at 303.102,-205.1 h2.54
  text ".X +/- 0.1" at 196.422,-206.111 h2.54
  text ".XX +/- 0.01" at 196.422,-209.159 h2.54
  text ".TitlePCB" at 348.568,-209.39 h5.59
  text ".XXX +/- 0.005" at 196.422,-212.207 h2.54
  text ".Title0" at 388.05,-219.2 h5.59
  text "THIRD ANGLE PROJECTION" at 133.684,-223.766 h2.54
  text "ALL SHEETS ARE THE" at 199.978,-227.864 h2.54
  text ".Title1" at 345.52,-228.44 h5.59
  text "SAME REVISION STATUS" at 197.628,-232.436 h2.54
  text "SIZE" at 342.218,-235.58 h2.54
  text "DRAWING NUMBER" at 351.87,-235.58 h2.54
  text "REV" at 458.942,-237.131 h3.05
  text "D" at 342.26,-243.421 h5.08
  text ".DocNumberPCB" at 351.87,-243.68 h6.6
  text ".Rev" at 458.55,-243.68 h5.08
  text "1" at 443.31,-248.76 h2.54
  text "1" at 458.55,-248.76 h2.54
  text "1:1" at 355.68,-249.014 h2.54
  text "SCALE" at 341.654,-249.189 h2.54
  text "SHEET   OF" at 427.561,-249.404 h2.54
  text "8" at 435.436,-259.936 h5.08
  text "1" at -318.055,-260.19 h5.08
  text "2" at -210.493,-261.184 h5.08
  text "4" at 5.58,-261.184 h5.08
  text "3" at -102.499,-261.343 h5.08
  text "5" at 113.579,-261.343 h5.08
  text "6" at 221.526,-261.343 h5.08
  text "7" at 329.5,-261.343 h5.08
PCB_SHEET2:
  lines w0.198: -341.412,271.438 -181.697,271.438 ; -341.412,276.518 -181.697,276.518 ; -308.316,271.565 -308.311,282.103 ; -275.677,271.057 -275.677,282.106 ; -194.397,265.723 -194.397,282.106 ; -366.95,-263.797 -366.95,294.806 ; -366.95,-263.797 496.483,-263.797 ; -366.95,-263.797 496.483,-263.797 ; -366.95,-263.797 -366.95,294.806 ; -366.95,294.806 496.483,294.806 ; -366.95,294.806 496.483,294.806 ; 496.483,-263.797 496.483,294.806 ; 496.483,-263.797 496.483,294.806
  lines w0.599: -360.782,-117.947 -341.732,-117.947 ; -360.782,155.102 -341.732,155.102 ; -341.732,282.101 -341.732,-251.297 ; -341.732,-232.247 -211.684,-232.247 ; -326.721,-244.947 -326.721,-232.247 ; -297.282,-251.297 -297.282,-244.947 ; -259.182,-260.822 -259.182,-251.297 ; -211.685,-251.167 -211.685,-232.628 ; -181.819,265.088 -181.819,282.103 ; -151.233,-260.822 -151.233,-251.297 ; -151.233,282.101 -151.233,291.626 ; -43.283,-260.822 -43.283,-251.297 ; -43.283,282.101 -43.283,291.626 ; 172.617,-260.822 172.617,-251.297 ; 172.617,282.101 172.617,291.626 ; 280.567,-260.822 280.567,-251.297 ; 388.516,-260.822 388.516,-251.297 ; 388.516,282.101 388.516,291.626 ; 471.066,155.102 490.116,155.102 ; 471.066,282.103 -341.745,282.103 ; 471.701,-117.947 490.751,-117.947 ; -341.745,282.103 -341.745,261.626 -341.745,282.103 ; -341.732,-251.297 471.066,-251.297 ; -341.732,-251.297 471.066,-251.297 ; -341.732,-251.297 471.066,-251.297 ; -341.732,-251.297 471.066,-251.297 ; -341.732,-244.947 -211.684,-244.947 ; -341.732,-244.947 -211.684,-244.947 ; -341.732,-244.947 -211.684,-244.947 ; -341.732,-244.947 -211.684,-244.947 ; -269.342,282.101 -269.342,291.753 ; -269.342,282.101 -269.342,291.753 ; -269.342,282.101 -269.342,291.753 ; -269.342,282.101 -269.342,291.753 ; -269.342,282.101 -269.342,291.753 ; -269.342,282.101 -269.342,291.753 ; -269.342,282.101 -269.342,291.753 ; -269.342,282.101 -269.342,291.753 ; -269.342,291.753 -181.799,291.753 ; -269.342,291.753 -186.792,291.753 -269.342,291.753 ; -269.342,291.753 -181.799,291.753 ; -256.642,282.101 -256.642,291.753 ; -256.642,282.101 -256.642,291.753 ; -256.642,282.101 -256.642,291.753 ; -256.642,282.101 -256.642,291.753 ; -181.799,291.753 -181.799,282.101 -181.799,291.753 ; 280.567,282.101 280.567,291.626 ; 280.567,282.101 280.567,291.626 ; 280.567,282.101 280.567,291.626 ; 280.567,282.101 280.567,291.626 ; 471.066,-251.297 471.066,274.278 471.066,-251.297 ; 471.066,-251.297 471.066,282.101 ; 471.066,-251.297 471.066,282.101 ; 471.066,-251.297 471.066,282.101 ; -351.892,14.64 -351.892,16.164 -346.812,16.164 -346.812,17.942 -341.732,15.402 -346.812,12.862 -346.812,14.64 -351.892,14.64 ; 62.127,-256.377 64.667,-251.297 67.207,-256.377 65.429,-256.377 65.429,-261.457 63.905,-261.457 63.905,-256.377 62.127,-256.377 ; 62.127,287.181 64.667,282.101 67.207,287.181 65.429,287.181 65.429,292.26 63.905,292.26 63.905,287.181 62.127,287.181 ; 471.066,15.402 476.146,12.862 476.146,14.64 481.226,14.64 481.226,16.164 476.146,16.164 476.146,17.942 471.066,15.402
  text "SH" at -257.47,288.663 h2.54
  text "DWG NO" at -182.318,288.248 h2.54
  text ".DocNumberPCB" at -198.969,285.408 h3.05
  text "8" at -300.405,284.92 h5.08
  text "4" at 123.953,284.92 h5.08
  text "2" at 340.026,284.92 h5.08
  text "6" at -91.993,284.76 h5.08
  text "5" at 15.954,284.76 h5.08
  text "3" at 232.032,284.76 h5.08
  text "3" at 232.032,284.76 h5.08
  text "1" at 447.754,284.76 h5.08
  text "1" at -262.469,284.392 h3.05
  text "REVISION HISTORY" at -208.621,278.013 h2.54
  text "APPROVED" at -318.857,271.946 h2.54
  text "DATE" at -288.377,271.946 h2.54
  text "DESCRIPTION" at -229.957,271.946 h2.54
  text "REV" at -184.237,271.946 h2.54
  text "SEE SHEET 1" at -196.937,266.866 h2.54
  text "A" at -348.464,221.255 h5.08
  text "A" at 489.823,221.255 h5.08
  text "B" at -348.414,81.395 h5.08
  text "B" at 489.873,81.395 h5.08
  text "C" at -348.998,-58.078 h5.08
  text "C" at 489.288,-58.078 h5.08
  text "Scale  6:1" at 325.673,-145.04 h12.7
  text "D" at -348.746,-197.777 h5.08
  text "D" at 489.541,-197.777 h5.08
  text "REV" at -329.409,-237.125 h3.05
  text ".DocNumberPCB" at -217.892,-242.404 h5.08
  text ".Rev" at -329.017,-243.674 h5.08
  text "2" at -329.017,-248.754 h2.54
  text "SHEET 2 OF" at -298.028,-249.398 h2.54
  text "8" at -305.903,-259.93 h5.08
  text "1" at 447.755,-260.184 h5.08
  text "4" at 123.953,-261.178 h5.08
  text "2" at 340.026,-261.178 h5.08
  text "7" at -199.967,-261.338 h5.08
  text "6" at -91.993,-261.338 h5.08
  text "5" at 15.954,-261.338 h5.08
  text "3" at 232.032,-261.338 h5.08

## Dimensions
0,12.7 to 40,12.7 on ASSY_TOP
37,6 to 3,6 on ASSY_TOP
0,12.7 to 0,0 on ASSY_TOP
193.12,66.206 to 174.705,162.72 on ASSY_TOP
197.565,69.381 to 176.61,152.566 on ASSY_TOP

## Text inside footprints (layer, text, board x,y; h text height)
J1: Top Overlay "1" at 4.887,0.635 h1.02